# Allegro board dwin.brd
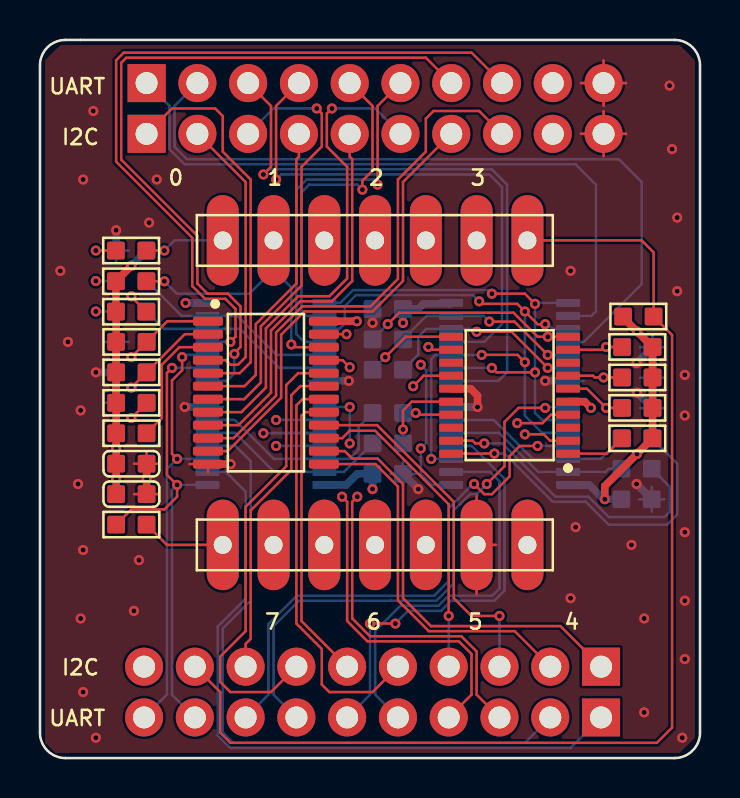
[diagram p0: board, top side]
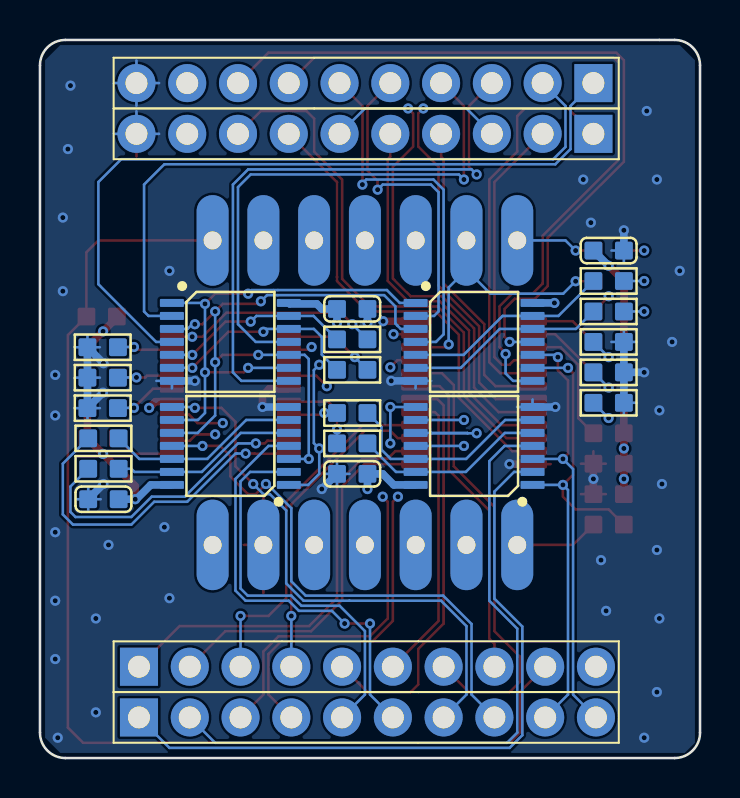
[diagram p1: board, bottom side, seen from below]

Outline 33.02 x 35.94 mm; copper layers: TOP, GND, PWR, BOTTOM. Coordinates in mm from the lower left corner of the outline.
Outline path: 0,34.67 arc(0.37,35.57) 1.27,35.94 31.75,35.94 arc(32.65,35.57) 33.02,34.67 33.02,1.27 arc(32.65,0.37) 31.75,0 1.27,0 arc(0.37,0.37) 0,1.27 0,34.67

## Design rules (mm)
constraint set DEFAULT: min track width 0.127

## Placement (name value [footprint] x y rotation side)
C1  100nF  [C0603]  4.57 13.21 0 top
C2  10uF  [C0603]  4.57 14.73 0 top
C3  100nF  [C0603]  17.4 22.48 180 bottom
C4  100nF  [C0603]  17.4 14.22 0 bottom
C5  100nF  [C0603]  4.57 25.4 180 bottom
C6  100nF  [C0603]  29.85 12.95 0 bottom
J1  Header 1x7 2.54mm  [HEADER7P_2D54_DIP_SLOT_0D9]  24.38 25.91 270 top
J2  Header 1x7 2.54mm  [HEADER7P_2D54_DIP_SLOT_0D9]  24.38 10.67 270 top
J3  Header 1x10 2.54mm  [HEADER10P_2D54_DIP]  5.33 31.24 270 bottom
J4  Header 1x10 2.54mm  [HEADER10P_2D54_DIP]  28.07 4.57 90 bottom
J5  Header 1x10 2.54mm  [HEADER10P_2D54_DIP]  5.33 33.78 270 bottom
J6  Header 1x10 2.54mm  [HEADER10P_2D54_DIP]  28.07 2.03 90 bottom
R1  10K  [R0603]  29.93 22.1 180 top
R2  0R  [R0603]  4.56 25.4 0 top
R3  0R  [R0603]  4.57 11.68 180 top
R4  10K  [R0603]  4.57 16.26 180 top
R5  0R  [R0603]  4.57 20.83 0 top
R6  0R  [R0603]  4.57 19.3 0 top
R7  0R  [R0603]  4.57 17.78 0 top
R8  10K  [R0603]  4.57 20.83 0 bottom
R9  10K  [R0603]  4.57 19.3 0 bottom
R10  10K  [R0603]  4.57 17.78 0 bottom
R11  10K  [R0603]  29.88 17.53 0 top
R12  10K  [R0603]  29.88 16 0 top
R13  0R  [R0603]  17.4 20.95 0 bottom
R14  0R  [R0603]  17.4 15.75 180 bottom
R15  10K  [R0603]  29.88 19.05 0 top
R16  10K  [R0603]  29.88 20.57 0 top
R17  0R  [R0603]  17.4 19.43 0 bottom
R18  0R  [R0603]  17.4 17.27 180 bottom
R19  0R  [R0603]  4.57 23.88 0 bottom
R20  0R  [R0603]  29.85 14.48 180 bottom
R21  0R  [R0603]  4.57 22.35 0 bottom
R22  0R  [R0603]  29.85 16 180 bottom
R23  10K  [R0603]  29.88 17.51 0 bottom
R24  10K  [R0603]  29.88 19.04 0 bottom
R25  10K  [R0603]  29.88 20.56 0 bottom
R26  4.7K  [R0603]  4.56 22.34 180 top
R27  4.7K  [R0603]  4.56 23.86 180 top
U1  CONTROLLER-TCA9548A  [TSSOP24_0D65_7_8X4_4X1D2MM]  11.3 18.29 270 top
U2  PCF8574  [TSSOP20-0_65-6_5X4_4X1MM]  23.5 18.16 90 top
U3  CD4066  [TSSOP14_0D65_5X4D4X1D2MM]  23.5 20.83 270 bottom
U4  CD4066  [TSSOP14_0D65_5X4D4X1D2MM]  11.3 15.62 90 bottom
U5  CD4066  [TSSOP14_0D65_5X4D4X1D2MM]  11.3 20.83 270 bottom
U6  CD4066  [TSSOP14_0D65_5X4D4X1D2MM]  23.5 15.62 90 bottom

## Library data of the parts
C1-C6 = CC
J1 J2 = Header 1x7
J3-J6 = Header 1x10
R1-R27 = R
U1 = TCA9548A
U2 = PCF8574
U3-U6 = CD4066

## Footprints (pads in the part's own frame, mm; a bottom-side part is the same pattern mirrored in y, then rotated)
C0603
  rrect 0.889x0.889 smd: 1(-0.762,0) 2(0.762,0)
HEADER7P_2D54_DIP_SLOT_0D9
  oval 4.532x1.6 hole 0.9: 1(0,0) 2(0,-2.54) 3(0,-5.08) 4(0,-7.62) 5(0,-10.16) 6(0,-12.7) 7(0,-15.24)
HEADER10P_2D54_DIP
  rect 1.905x1.905 hole 1.1: 1(0,0)
  round 1.905 hole 1.1: 2(0,-2.54) 3(0,-5.08) 4(0,-7.62) 5(0,-10.16) 6(0,-12.7) 7(0,-15.24) 8(0,-17.78) 9(0,-20.32) 10(0,-22.86)
R0603
  rrect 0.889x0.889 smd: 1(-0.762,0) 2(0.762,0)
TSSOP14_0D65_5X4D4X1D2MM
  rrect 0.4x1.2 smd: 1(-1.95,-2.925) 2(-1.3,-2.925) 3(-0.65,-2.925) 4(0,-2.925) 5(0.65,-2.925) 6(1.3,-2.925) 7(1.95,-2.925) 8(1.95,2.925) 9(1.3,2.925) 10(0.65,2.925) 11(0,2.925) 12(-0.65,2.925) 13(-1.3,2.925) 14(-1.95,2.925)
TSSOP20-0_65-6_5X4_4X1MM
  rrect 0.4x1.2 smd: 1(-2.925,-2.925) 2(-2.275,-2.925) 3(-1.625,-2.925) 4(-0.975,-2.925) 5(-0.325,-2.925) 6(0.325,-2.925) 7(0.975,-2.925) 8(1.625,-2.925) 9(2.275,-2.925) 10(2.925,-2.925) 11(2.925,2.925) 12(2.275,2.925) 13(1.625,2.925) 14(0.975,2.925) 15(0.325,2.925) 16(-0.325,2.925) 17(-0.975,2.925) 18(-1.625,2.925) 19(-2.275,2.925) 20(-2.925,2.925)
TSSOP24_0D65_7_8X4_4X1D2MM
  rrect 0.45x1.5 smd: 1(-3.575,-2.9) 2(-2.925,-2.9) 3(-2.275,-2.9) 4(-1.625,-2.9) 5(-0.975,-2.9) 6(-0.325,-2.9) 7(0.325,-2.9) 8(0.975,-2.9) 9(1.625,-2.9) 10(2.275,-2.9) 11(2.925,-2.9) 12(3.575,-2.9) 13(3.575,2.9) 14(2.925,2.9) 15(2.275,2.9) 16(1.625,2.9) 17(0.975,2.9) 18(0.325,2.9) 19(-0.325,2.9) 20(-0.975,2.9) 21(-1.625,2.9) 22(-2.275,2.9) 23(-2.925,2.9) 24(-3.575,2.9)

## Nets
3V3: C1.1 C2.1 C3.1 C4.1 C5.1 C6.1 J2.3 J3.9 J5.9 R1.2 R4.2 R5.1 R6.1 R7.1 R11.2 R12.2 R15.2 R16.2 R26.2 R27.2 U1.24(VCC) U2.5(VCC) U3.14 U4.14 U5.14 U6.14
GND: C1.2 C2.2 C3.2 C4.2 C5.2 C6.2 J2.2 J3.10 J5.10 R8.1 R9.1 R10.1 R23.2 R24.2 R25.2 U1.12 U2.15 U3.7(VSS) U4.7(VSS) U5.7(VSS) U6.7(VSS)
A0: R5.2 R8.2 U1.1
A1: R6.2 R9.2 U1.2
A2: R7.2 R10.2 U1.21
CH0: R13.1 U2.10
CH1: R17.1 U2.11
CH2: R19.1 U2.12
CH3: R21.1 U2.14
CH4: R14.1 U2.16
CH5: R18.1 U2.17
CH6: R20.1 U2.19
CH7: R22.1 U2.20
KEY_PUSH: J1.1 J4.9 R1.1
RX0: J5.2 U3.4
RX1: J5.4 U3.11
RX2: J5.6 U5.4
RX3: J5.8 U5.11
RX4: J6.2 U4.4
RX5: J6.4 U4.11
RX6: J6.6 U6.4
RX7: J6.8 U6.11
SCL_0: J3.1 U1.5
SCL_1: J3.3 U1.7
SCL_2: J3.5 U1.9
SCL_3: J3.7 U1.11
SCL_4: J4.1 U1.14
SCL_5: J4.3 U1.16
SCL_6: J4.5 U1.18
SCL_7: J4.7 U1.20
SDA_0: J3.2 U1.4
SDA_1: J3.4 U1.6
SDA_2: J3.6 U1.8
SDA_3: J3.8 U1.10
SDA_4: J4.2 U1.13
SDA_5: J4.4 U1.15
SDA_6: J4.6 U1.17
SDA_7: J4.8 U1.19
TX0: J5.1 U3.2
TX1: J5.3 U3.8
TX2: J5.5 U5.2
TX3: J5.7 U5.8
TX4: J6.1 U4.2
TX5: J6.3 U4.8
TX6: J6.5 U6.2
TX7: J6.7 U6.8
XIAO_RX: J6.10 R2.1 U3.3 U3.10 U4.3 U4.10 U5.3 U5.10 U6.3 U6.10
XIAO_SCL: J1.6 R27.1 U1.22 U2.2
XIAO_SDA: J1.5 R26.1 U1.23 U2.4
XIAO_TX: J6.9 R3.2 U3.1 U3.9 U4.1 U4.9 U5.1 U5.9 U6.1 U6.9
N21649397: R4.1 U1.3
N21651335: R13.2 U3.5 U3.13
N21651359: R17.2 U3.6 U3.12
N21652555: R19.2 U5.5 U5.13
N21652587: R21.2 U5.6 U5.12
N21653000: R14.2 U4.5 U4.13
N21653032: R18.2 U4.6 U4.12
N21653118: R20.2 U6.5 U6.13
N21653150: R22.2 U6.6 U6.12
N21654351: R11.1 R23.1 U2.6
N21654354: R15.1 R24.1 U2.7
N21654357: R16.1 R25.1 U2.9
N21654696: R12.1 U2.1
N21658886: J2.7 R3.1
N21659759: J1.7 R2.2

Pads without a net: J1 2 3 4; J2 1 4 5 6; J4 10; U2 3 8 13 18

## Via types
v1: diameter 0.508, hole 0.254, TOP to BOTTOM, 123 vias

## Routing (per net, layer and track width the routed paths; a pad name or vN(x,y) marks a point on that pad's centre or on a via; arc(x,y) is an arc through that point)
3V3: length 53.1
  TOP w0.381: v1(28.26,12.95) 28.26,13.61 v1(29.86,15.22) R12.2 R11.2 R15.2 R16.2 v1(29.86,21.36) 29.17,22.05 R1.2 ; C1.1 v1(3.81,13.97) C2.1 v1(3.81,15.49) R4.2 R7.1 R6.1 R5.1 3.81,22.33 R26.2 R27.2 v1(4.57,24.64) ; v1(27.56,17.53) 27.25,17.84 U2.5 ; U1.24 v1(15.85,21.86)
  PWR w0.127: J3.9 25.65,32.37 ; J3.9 26.78,31.24 ; J3.9 25.65,30.11 ; J3.9 24.52,31.24 ; 25.65,32.65 J5.9 ; J5.9 25.65,34.91 ; J5.9 24.52,33.78 ; J5.9 26.78,33.78 ; J2.3 19.3,13.11 ; J2.3 20.28,10.67 ; J2.3 18.33,10.67 ; J2.3 19.3,8.22
  BOTTOM w0.381: v1(16.64,13.46) C4.1 15.88,14.22 15.32,13.67 U4.14 ; U3.14 20.52,22.73 19.18,22.73 18.92,22.48 C3.1 v1(18.16,21.78) ; v1(4.57,24.64) C5.1 ; U6.14 27.48,13.67 28.19,12.95 v1(28.26,12.95) C6.1 ; U5.14 v1(7.28,22.78)
GND: length 83.7
  TOP w0.127: J2.2 21.84,13.11 ; J2.2 21.84,8.22 ; J2.2 22.82,10.67 ; 7.47,14.71 U1.12 8.4,14.31 ; J5.10 29.32,33.78 ; J5.10 28.19,32.65 ; J5.10 27.06,33.78 ; J5.10 28.19,34.91 ; 4.71,13.21 C1.2 5.96,13.21 ; C2.2 5.33,15.35 ; C2.2 4.71,14.73 ; C2.2 5.96,14.73 ; J3.10 28.19,32.37 ; J3.10 28.19,30.11 ; J3.10 27.06,31.24 ; J3.10 29.32,31.24
  TOP w0.381: v1(21.89,17.57) 21.89,18.14 21.55,18.49 U2.15 ; v1(9.53,14.71) U1.12 ; C1.2 v1(5.33,13.97) C2.2
  GND w0.127: 27.06,33.78 J5.10 ; J5.10 28.19,34.91 ; J5.10 29.32,33.78 ; J5.10 28.19,32.65 ; J2.2 21.84,13.11 ; J2.2 20.87,10.67 ; J2.2 22.82,10.67 ; J2.2 21.84,8.22 ; J3.10 29.32,31.24 ; J3.10 28.19,32.37 ; J3.10 27.06,31.24 ; J3.10 28.19,30.11
  BOTTOM w0.127: 30.65,16.89 R23.2 ; R23.2 30.02,17.51 ; R23.2 31.27,17.51 ; J3.10 28.19,32.37 ; J3.10 27.06,31.24 ; J3.10 29.32,31.24 ; C6.2 30.61,13.58 ; C6.2 31.23,12.95 ; C6.2 29.98,12.95 ; C6.2 30.61,12.33 ; R8.1 4.43,20.83 ; R8.1 3.81,21.45 ; R8.1 3.19,20.83 ; J5.10 29.32,33.78 ; J5.10 28.19,32.65 ; J5.10 28.19,34.91 ; J5.10 27.06,33.78 ; C4.2 18.78,14.22 ; C4.2 17.54,14.22 ; C4.2 18.16,14.85 ; C4.2 18.16,13.6 ; 4.43,25.4 C5.2 3.81,24.78 ; 30.02,20.56 R25.2 ; R25.2 30.65,21.18 ; R25.2 31.27,20.56 ; 9.16,17.57 U4.7 8.38,17.95 ; 26.42,18.5 U3.7 27.2,18.88 ; 13.45,18.88 U5.7 14.23,18.5 ; 3.81,17.16 R10.1 3.19,17.78 ; 31.27,19.04 R24.2 30.02,19.04
  BOTTOM w0.381: C5.2 v1(3.81,26.42) ; R10.1 R9.1 ; R9.1 v1(2.79,19.3) ; R9.1 R8.1 ; U4.7 v1(7.24,17.57) ; U3.7 v1(25.27,18.88) ; v1(29.85,19.76) R25.2 R24.2 R23.2 v1(29.87,18.29) ; v1(16.64,21.78) C3.2 ; C4.2 v1(18.92,13.46) ; U5.7 v1(15.45,18.88) ; C6.2 v1(29.85,13.72) ; U6.7 v1(21.89,17.57)
  vias: v1(1.02,24.38) v1(1.4,20.83) v1(1.91,13.72) v1(2.03,17.4) v1(2.03,6.99) v1(2.16,28.96) v1(2.16,10.41) v1(2.16,3.3) v1(2.67,32.38) v1(2.79,1.02) v1(4.7,7.37) v1(4.95,9.91) v1(5.46,26.8) v1(5.84,28.96) v1(26.54,24.38) v1(26.54,8) v1(26.8,11.56) v1(29.59,10.67) v1(30.23,6.99) v1(30.23,2.29) v1(31.5,33.65) v1(31.62,30.48) v1(31.88,27.05) v1(31.88,23.37) v1(32.13,1.02) v1(32.26,19.18) v1(32.26,17.14) v1(32.26,11.3) v1(32.26,7.87) v1(32.26,4.95)
A0: length 5.7
  TOP w0.127: v1(4.57,20.07) R5.2 6.37,21.86 U1.1
  BOTTOM w0.127: R5.2 v1(4.57,20.07)
A1: length 6
  TOP w0.127: U1.2 7.24,21.21 R6.2 v1(4.57,18.54)
  BOTTOM w0.127: R6.2 v1(4.57,18.54)
A2: length 15.6
  TOP w0.127: R7.2 v1(4.57,17.02) ; v1(15.49,19.56) 15.14,19.91 U1.21
  PWR w0.127: v1(4.57,17.02) 5.97,17.02 8.51,19.56 v1(15.49,19.56)
  BOTTOM w0.127: v1(4.57,17.02) R7.2
CH0: length 10.8
  TOP w0.127: U2.10 v1(25.4,21.09) 24.89,21.09 23.69,22.29 17.97,22.29 v1(17.4,21.72)
  BOTTOM w0.127: R13.1 v1(17.4,21.72)
CH1: length 4.6
  TOP w0.127: U2.11 18.29,21.09 v1(17.27,20.07)
  BOTTOM w0.127: v1(17.27,20.07) R17.1
CH2: length 20.2
  TOP w0.127: U2.12 19.57,20.44 v1(19.43,20.57)
  PWR w0.127: v1(19.43,20.57) 19.24,20.77 15.05,20.77 14.1,21.72 4.95,21.72 v1(2.79,23.88)
  BOTTOM w0.127: R19.1 v1(2.79,23.88)
CH3: length 20.6
  TOP w0.127: U2.14 19.19,19.14 v1(18.67,18.61)
  PWR w0.127: v1(2.79,22.35) 3.81,21.34 13.84,21.34 14.66,20.51 16.19,20.51 18.09,18.61 v1(18.67,18.61)
  BOTTOM w0.127: R21.1 v1(2.79,22.35)
CH4: length 4.2
  TOP w0.127: U2.16 18.6,17.84 18.16,17.4 v1(18.16,16.45)
  BOTTOM w0.127: v1(18.16,16.45) R14.1
CH5: length 2.4
  TOP w0.127: U2.17 18.88,17.19 v1(18.8,17.27)
  BOTTOM w0.127: R18.1 v1(18.8,17.27)
CH6: length 15.1
  TOP w0.127: v1(22.23,15.75) 21.78,15.75 21.64,15.89 U2.19
  BOTTOM w0.127: v1(22.23,15.75) 23.11,15.75 25.78,13.08 27.43,13.08 28.45,12.06 31.24,12.06 31.5,12.32 31.5,13.59 R20.1
CH7: length 17.3
  TOP w0.127: U2.20 22.28,15.24 22.29,15.24 v1(22.73,15.24)
  BOTTOM w0.127: v1(22.73,15.24) 23.18,15.24 23.18,15.24 23.25,15.24 25.65,12.83 27.31,12.83 28.45,11.68 31.37,11.68 31.88,12.19 31.88,14.73 R22.1
KEY_PUSH: length 57.7
  TOP w0.127: J4.9 9.02,3.3 9.02,1.27 9.53,0.76 30.86,0.76 31.62,1.52 31.62,21.17 R1.1 30.7,25.31 30.1,25.91 J1.1
RX0: length 37.8
  BOTTOM w0.127: J5.2 6.73,32.64 6.73,30.59 7.34,29.97 28.96,29.97 30.1,28.83 30.1,23.72 27.21,20.83 U3.4
RX1: length 26.7
  TOP w0.127: v1(11.81,28.96) 11.81,32.64 J5.4
  BOTTOM w0.127: v1(11.81,28.96) 12.06,29.21 22.48,29.21 23.11,28.57 23.11,21.72 22.23,20.83 U3.11
RX2: length 18.8
  TOP w0.127: v1(16.89,28.7) 16.89,32.64 J5.6
  BOTTOM w0.127: v1(16.89,28.7) 16.89,28.77 16.7,28.96 13.34,28.96 12.83,28.45 12.83,21.21 13.21,20.83 U5.4
RX3: length 38.6
  TOP w0.127: 9.53,20.89 v1(9.53,20.83) 9.78,21.08 9.78,22.48 9.27,22.99 8.25,22.99 7.62,23.62 7.62,26.03 3.81,29.84 3.81,34.93 4.19,35.31 21.59,35.31 J5.8
  BOTTOM w0.127: U5.11 v1(9.53,20.83)
RX4: length 33.8
  BOTTOM w0.127: U4.4 9.78,15.62 10.54,14.86 10.54,7.87 9.14,6.48 9.14,1.27 9.65,0.76 24.26,0.76 J6.2
RX5: length 24.8
  TOP w0.127: v1(15.11,13.08) 15.37,12.83 15.37,6.86 16.38,5.84 20.96,5.84 21.59,5.21 21.59,3.18 J6.4
  PWR w0.127: v1(15.11,13.08) 15.11,14.99 14.48,15.62 v1(11.81,15.62)
  BOTTOM w0.127: v1(11.81,15.62) U4.11
RX6: length 21.5
  TOP w0.127: v1(16.51,6.73) v1(17.78,6.73)
  BOTTOM w0.127: J6.6 16.51,3.18 v1(16.51,6.73) ; U6.4 21.59,15.62 23.24,13.97 23.24,8.38 22.73,7.87 20.57,7.87 20.07,7.37 18.42,7.37 v1(17.78,6.73)
RX7: length 27
  TOP w0.127: v1(21.72,13.72) 22.23,13.21 22.61,13.21 23.5,14.1 23.5,15.11 24,15.62 v1(24.89,15.62)
  BOTTOM w0.127: v1(21.72,13.72) 21.66,13.72 20.45,12.51 20.45,8.85 19.73,8.13 12.85,8.13 11.43,6.71 11.43,3.18 J6.8 ; v1(24.89,15.62) U6.11
SCL_0: length 19.8
  TOP w0.127: U1.5 9.99,19.26 10.54,19.81 10.54,28.96 9.14,30.35 9.14,32.13 8.76,32.51 6.6,32.51 J3.1
SCL_1: length 22
  TOP w0.127: U1.7 10.22,17.96 11.05,18.8 11.05,21.61 13.08,23.64 13.08,29.59 14.1,30.61 14.1,32.26 v1(13.84,32.51)
  BOTTOM w0.127: J3.3 11.68,32.51 v1(13.84,32.51)
SCL_2: length 19.4
  TOP w0.127: J3.5 15.49,30.1 15.62,29.97 15.62,23.88 14.61,22.86 13.02,22.86 11.56,21.4 11.56,18.29 9.93,16.66 U1.9
SCL_3: length 23.5
  TOP w0.127: U1.11 9.39,15.36 12.06,18.03 12.06,21.19 13.23,22.35 16.43,22.35 16.43,22.35 16.64,22.35 18.16,23.88 18.16,24.09 18.16,28.83 J3.7
SCL_4: length 21.7
  TOP w0.127: U1.14 15.24,15.36 15.62,14.99 16.89,14.99 18.16,13.72 18.16,8 19.56,6.6 26.04,6.6 J4.1
SCL_5: length 18.1
  TOP w0.127: U1.16 16.87,16.66 20.7,12.83 20.7,8 21.59,7.11 v1(22.99,7.11)
  BOTTOM w0.127: J4.3 v1(22.99,7.11)
SCL_6: length 20.5
  TOP w0.127: U1.18 13.14,17.96 12.83,17.65 12.83,6.73 14.1,5.46 14.1,3.68 14.48,3.3 16.64,3.3 J4.5
SCL_7: length 22.9
  TOP w0.127: U1.20 12.91,19.26 12.32,18.67 12.32,14.6 10.29,12.57 10.29,6.35 9.02,5.08 9.02,3.81 9.53,3.3 11.56,3.3 J4.7
SDA_0: length 14.3
  TOP w0.127: U1.4 9.3,19.91 9.53,19.69 9.91,19.69 10.29,20.07 10.29,28.83 J3.2
SDA_1: length 15.6
  TOP w0.127: J3.4 12.95,30.1 12.83,29.97 12.83,23.75 10.8,21.72 10.8,19.18 10.23,18.61 U1.6
SDA_2: length 24.5
  TOP w0.127: U1.8 10.07,17.31 11.3,18.54 11.3,21.51 12.91,23.11 14.48,23.11 15.37,24 15.37,29.59 14.35,30.61 14.35,32.26 v1(14.61,32.51)
  BOTTOM w0.127: J3.6 16.76,32.51 v1(14.61,32.51)
SDA_3: length 27.7
  TOP w0.127: J3.8 21.97,32.38 19.69,32.38 19.3,32 19.3,30.35 17.91,28.96 17.91,23.98 16.53,22.61 13.12,22.61 11.81,21.3 11.81,18.14 9.68,16.01 U1.10
SDA_4: length 18.9
  TOP w0.127: U1.13 16.78,14.71 17.91,13.59 17.91,7.9 19.45,6.35 23.75,6.35 J4.2
SDA_5: length 16.1
  TOP w0.127: v1(20.45,7.11) 20.45,12.7 16.76,16.38 15.49,16.38 15.12,16.01 U1.15
  BOTTOM w0.127: J4.4 v1(20.45,7.11)
SDA_6: length 14.7
  TOP w0.127: U1.17 13.26,17.31 13.08,17.13 13.08,6.86 J4.6
SDA_7: length 16.4
  TOP w0.127: U1.19 13.03,18.61 12.57,18.16 12.57,14.42 10.54,12.39 10.54,5.97 10.29,5.71 J4.8
TX0: length 33.7
  BOTTOM w0.127: U3.2 27.59,22.13 27.81,22.35 27.81,28.7 26.8,29.72 7.24,29.72 6.48,30.48 6.48,32.64 J5.1
TX1: length 30.2
  TOP w0.127: v1(11.18,29.21) 11.56,29.59 11.56,32.64 J5.3
  BOTTOM w0.127: U3.8 22.94,18.88 23.37,19.3 23.37,28.7 22.61,29.46 11.43,29.46 v1(11.18,29.21)
TX2: length 16.5
  TOP w0.127: v1(16.13,28.45) 16.13,28.89 16.64,29.4 16.64,32.64 J5.5
  BOTTOM w0.127: U5.2 13.31,22.13 13.08,22.35 13.08,28.32 13.46,28.7 15.88,28.7 v1(16.13,28.45)
TX3: length 37.4
  TOP w0.127: v1(9.73,20.23) 9.73,20.27 10.03,20.57 10.03,22.61 9.4,23.24 8.38,23.24 7.87,23.75 7.87,26.14 4.06,29.95 4.06,34.8 4.32,35.05 19.3,35.05 J5.7
  BOTTOM w0.127: v1(9.73,20.23) 9.73,19.25 9.35,18.88 U5.8
TX4: length 35.2
  BOTTOM w0.127: U4.2 9.3,14.32 10.29,13.33 10.29,7.98 8.89,6.58 8.89,1.14 9.53,0.51 26.54,0.51 J6.1
TX5: length 22.8
  TOP w0.127: v1(15.88,13.08) 15.62,12.83 15.62,6.99 16.51,6.1 21.08,6.1 21.84,5.33 21.84,3.18 J6.3
  PWR w0.127: v1(15.88,13.08) 15.88,15.37 v1(15.49,15.75)
  BOTTOM w0.127: v1(15.49,15.75) v1(15.49,17.57) U4.8
TX6: length 19.9
  BOTTOM w0.127: U6.2 22.51,14.32 22.99,13.84 22.99,8.49 22.63,8.13 20.45,8.13 19.94,7.62 18.03,7.62 16.76,6.36 16.76,3.18 J6.5
TX7: length 27.8
  TOP w0.127: v1(22.35,13.72) 23.24,14.6 23.24,16.83 23.94,17.53 v1(25.27,17.53)
  BOTTOM w0.127: v1(25.27,17.53) 25.32,17.57 U6.8 ; J6.7 11.68,3.18 11.68,6.6 12.95,7.87 17.55,7.87 19.83,7.87 20.7,8.74 20.7,12.39 21.52,13.21 21.84,13.21 v1(22.35,13.72)
XIAO_RX: length 83.5
  TOP w0.127: v1(6.86,14.97) 6.6,15.23 6.6,18.9 7.11,19.41 v1(7.11,20.07) ; R2.1 v1(2.79,25.4) ; v1(22.1,20.18) 23.89,20.18 v1(24.26,19.81) ; v1(25.27,21.71) 24.9,21.71 v1(24.26,22.35) 23.88,22.73 22.1,22.73 v1(21.97,22.86)
  PWR w0.127: v1(19.57,14.97) 17.67,14.97 16.38,16.26 v1(11.18,16.26) 8.14,16.26 v1(6.86,14.97) ; v1(7.11,20.07) 6.22,20.95 3.43,20.95 2.29,22.1 2.29,24.89 v1(2.79,25.4)
  BOTTOM w0.127: U6.10 25.13,16.27 24.26,17.14 v1(24.26,19.81) v1(24.26,22.35) ; J6.10 6.35,3.18 6.35,14.46 v1(6.86,14.97) U4.3 ; U3.3 25.64,21.48 25.4,21.71 v1(25.27,21.71) ; 11.62,16.26 v1(11.18,16.26) ; 11.62,16.26 13.42,16.26 13.44,16.27 ; 11.62,16.26 11.64,16.27 13.44,16.27 ; U5.3 14.97,21.48 15.15,21.66 15.24,21.75 15.24,22.61 15.8,23.17 21.12,23.17 21.22,23.17 21.66,23.17 v1(21.97,22.86) ; 13.44,16.27 U4.10 ; v1(22.1,20.18) U3.10 19.78,20.18 19.57,19.97 v1(19.57,14.97) U6.3 ; v1(7.11,20.07) 7.22,20.18 U5.10
XIAO_SCL: length 30.2
  TOP w0.127: R27.1 v1(6.22,23.86) ; U1.22 12.71,20.56 v1(12.57,20.7) ; U2.2 25.52,15.89 25.2,16.2 v1(24.26,16.2)
  PWR w0.127: v1(24.26,16.2) 22.53,16.2 20.57,18.16 18.16,18.16 16.06,20.26 13.01,20.26 v1(12.57,20.7)
  BOTTOM w0.127: 11.68,24.44 12.57,23.55 v1(12.57,20.7) ; 11.68,24.44 J1.6 ; 11.68,24.44 10.48,23.24 6.85,23.24 v1(6.22,23.86)
XIAO_SDA: length 32.2
  TOP w0.127: R26.1 4.57,23.09 v1(4.57,23.11) ; U2.4 25.56,17.19 25.14,16.76 v1(23.88,16.76) ; U1.23 v1(15.33,21.21)
  PWR w0.127: v1(23.88,16.76) 23.88,19.56 22.74,20.7 20.19,20.7 19.68,21.21 v1(15.33,21.21) 14.32,22.22 ; J1.5 14.22,22.35 14.24,22.34 14.24,22.31 14.32,22.22 ; 14.32,22.22 5.46,22.22 v1(4.57,23.11)
XIAO_TX: length 79.5
  TOP w0.127: v1(24.77,22.73) 24.26,23.24 v1(22.61,23.24) ; v1(24.77,19.3) 22.83,19.3 v1(22.61,19.53) ; v1(6.6,19.53) 6.35,19.27 6.35,14.18 v1(6.86,13.67) 6.86,13.08 6.22,12.45 4.57,12.45 R3.2
  PWR w0.127: v1(19.05,15.49) 17.78,15.49 16.35,16.92 v1(11.81,16.92) 8.03,16.92 6.35,15.24 6.35,14.18 v1(6.86,13.67) ; v1(19.05,19.69) 19.21,19.53 v1(22.61,19.53)
  BOTTOM w0.127: U5.9 v1(6.6,19.53) ; J6.9 6.6,3.18 6.6,13.42 v1(6.86,13.67) U4.1 ; v1(11.81,16.92) U4.9 ; U3.1 24.81,22.78 v1(24.77,22.73) v1(24.77,19.3) 24.77,17.27 25.12,16.92 U6.9 ; U6.1 19.6,13.67 19.05,14.22 v1(19.05,15.49) 19.32,15.76 19.32,19.42 v1(19.05,19.69) ; v1(22.61,23.24) 22.42,23.42 21.33,23.42 21.12,23.42 15.66,23.42 15.02,22.78 U5.1 ; U3.9 v1(22.61,19.53)
N21649397: length 6.4
  TOP w0.127: R4.1 6.1,17.02 6.1,19.69 6.97,20.56 U1.3
N21651335: length 9.6
  TOP w0.127: v1(22.48,21.84) 23.73,21.84 v1(25.4,20.18)
  BOTTOM w0.127: R13.2 19.33,22.13 U3.13 22.2,22.13 v1(22.48,21.84) ; v1(25.4,20.18) U3.5
N21651359: length 10.4
  TOP w0.127: v1(21.84,21.34) 23.59,21.34 v1(25.4,19.53)
  BOTTOM w0.127: v1(21.84,21.34) 21.7,21.48 U3.12 19.32,21.48 18.92,21.08 18.92,20.19 R17.2 ; U3.6 v1(25.4,19.53)
N21652555: length 10.4
  BOTTOM w0.127: U5.5 11.83,20.18 9.88,22.13 U5.13 7.08,22.13 R19.2
N21652587: length 10.1
  BOTTOM w0.127: U5.6 11.97,19.53 10.02,21.48 U5.12 6.21,21.48 R21.2
N21653000: length 9.7
  BOTTOM w0.127: U4.5 9.76,16.27 11.71,14.32 U4.13 15.21,14.32 R14.2
N21653032: length 10.7
  BOTTOM w0.127: U4.6 9.75,16.92 11.7,14.97 U4.12 15.47,14.97 15.94,15.44 15.94,16.57 R18.2
N21653118: length 9.4
  BOTTOM w0.127: R20.2 28.45,14.48 28.29,14.32 U6.13 24.92,14.32 22.97,16.27 U6.5
N21653150: length 9.7
  BOTTOM w0.127: U6.6 22.7,16.92 24.65,14.97 U6.12 28.05,14.97 R22.2
N21654351: length 3.9
  TOP w0.127: U2.6 27.36,18.49 v1(28.32,17.53) R11.1
  BOTTOM w0.127: R23.1 29.11,17.53 v1(28.32,17.53)
N21654354: length 3.7
  TOP w0.127: R15.1 v1(28.19,19.05) 27.75,19.05 27.66,19.14 U2.7
  BOTTOM w0.127: R24.1 29.11,19.05 v1(28.19,19.05)
N21654357: length 3.7
  TOP w0.127: 28.49,20.57 v1(28.32,20.57) ; 28.49,20.57 28.35,20.44 U2.9 ; 28.49,20.57 R16.1
  BOTTOM w0.127: R25.1 29.11,20.57 v1(28.32,20.57)
N21654696: length 3
  TOP w0.127: U2.1 28.36,15.24 R12.1
N21658886: length 4.2
  TOP w0.127: J2.7 6.35,10.67 R3.1
N21659759: length 4
  TOP w0.127: R2.2 v1(6.22,25.4)
  BOTTOM w0.127: v1(6.22,25.4) 6.73,25.91 J1.7

## Copper pours and planes (outline as drawn; the poured copper is in the pictures)
3V3 on PWR: 1.02,35.69 32,35.69 32.77,34.93 32.77,1.02 32,0.25 0.76,0.25 0.25,0.76 0.25,34.93 ; 6 cut-outs
GND on TOP: 1.02,35.69 32,35.69 32.77,34.93 32.77,1.02 32,0.25 0.76,0.25 0.25,0.76 0.25,34.93 ; 31 cut-outs
GND on BOTTOM: 1.02,35.69 32,35.69 32.77,34.93 32.77,1.02 32,0.25 0.76,0.25 0.25,0.76 0.25,34.93 ; 30 cut-outs
GND on GND: 1.02,35.69 32,35.69 32.77,34.93 32.77,1.02 32,0.25 0.76,0.25 0.25,0.76 0.25,34.93

## Text on the board
Ref Des/Silkscreen Top: UART | I2C | 0 | 7 | 1 | 6 | 2 | 5 | 3 | 4 | LAYER 2 - SECONDARY SIDE - SIGNAL | LAYER 1 - PRIMARY SIDE - SIGNAL | LAYER# | COPPER WEIGHT | HALF+PLATING | (OZ) | IMPEDANCE CONTROL | +/- 10% | 50ohm SINGLE ENDED | TRACE WIDTH | TRACE WIDTH / SPACE | 90ohm DIFFERENTIAL | 100ohm DIFFERENTIAL | 9.5/5 | 6.5/5 | LAYER STACK-UP - ALL DIMENSIONS IN INCHES
User.23: FIGURE | FINISHED_SIZE | 35.43x35.43 | SLOT HOLES: TOP to BOTTOM | ALL UNITS ARE IN MILS | ROTATION | 90.000 | PLATED | QTY | 14 | TOTAL HOLES:
User.24: FIGURE | FINISHED_SIZE | 10.0 | 43.31 | DRILL CHART: TOP to BOTTOM | ALL UNITS ARE IN MILS | ROTATION | - | PLATED | QTY | 123 | 40 | 163 | TOTAL HOLES:
